# EAGLE board Screen-Adapters_multiple_v2 (EAGLE 7.0.0)
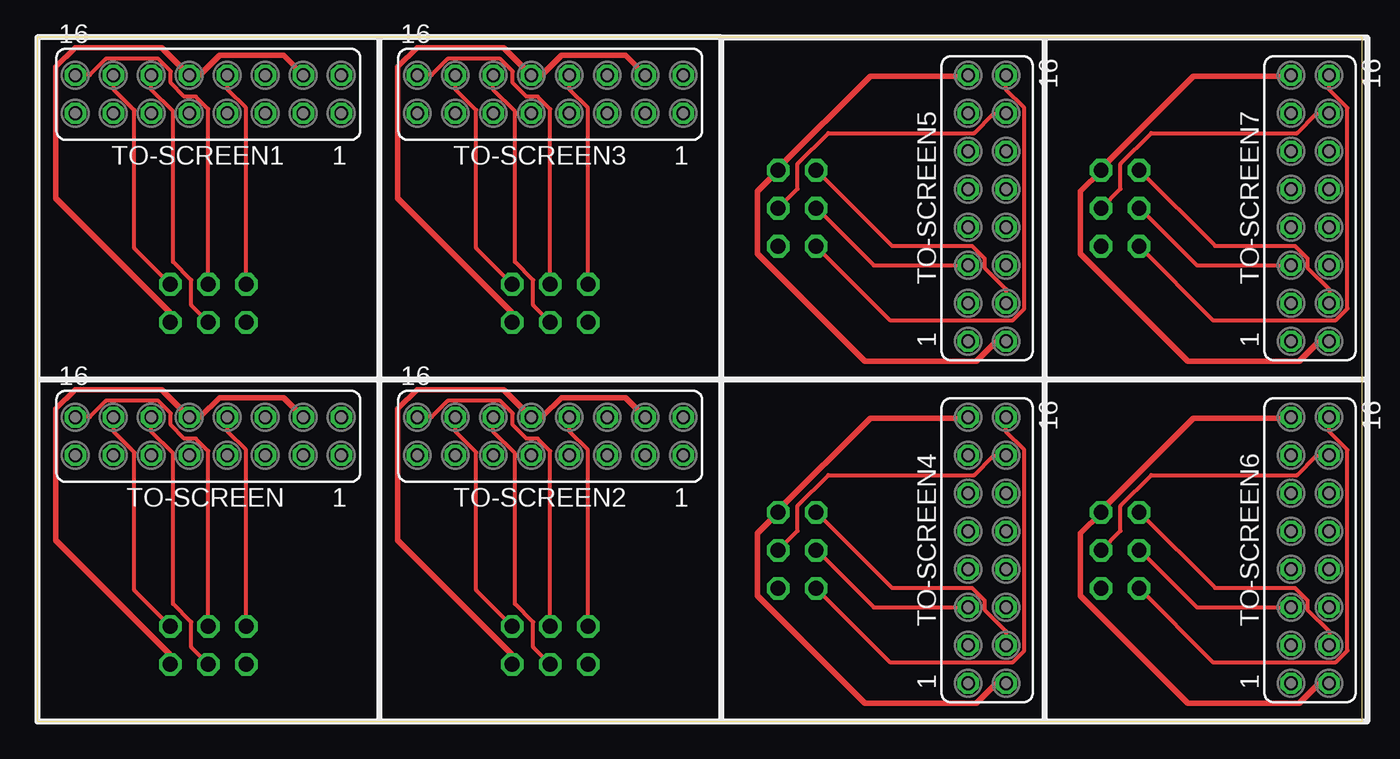
[diagram p0: board, top side]
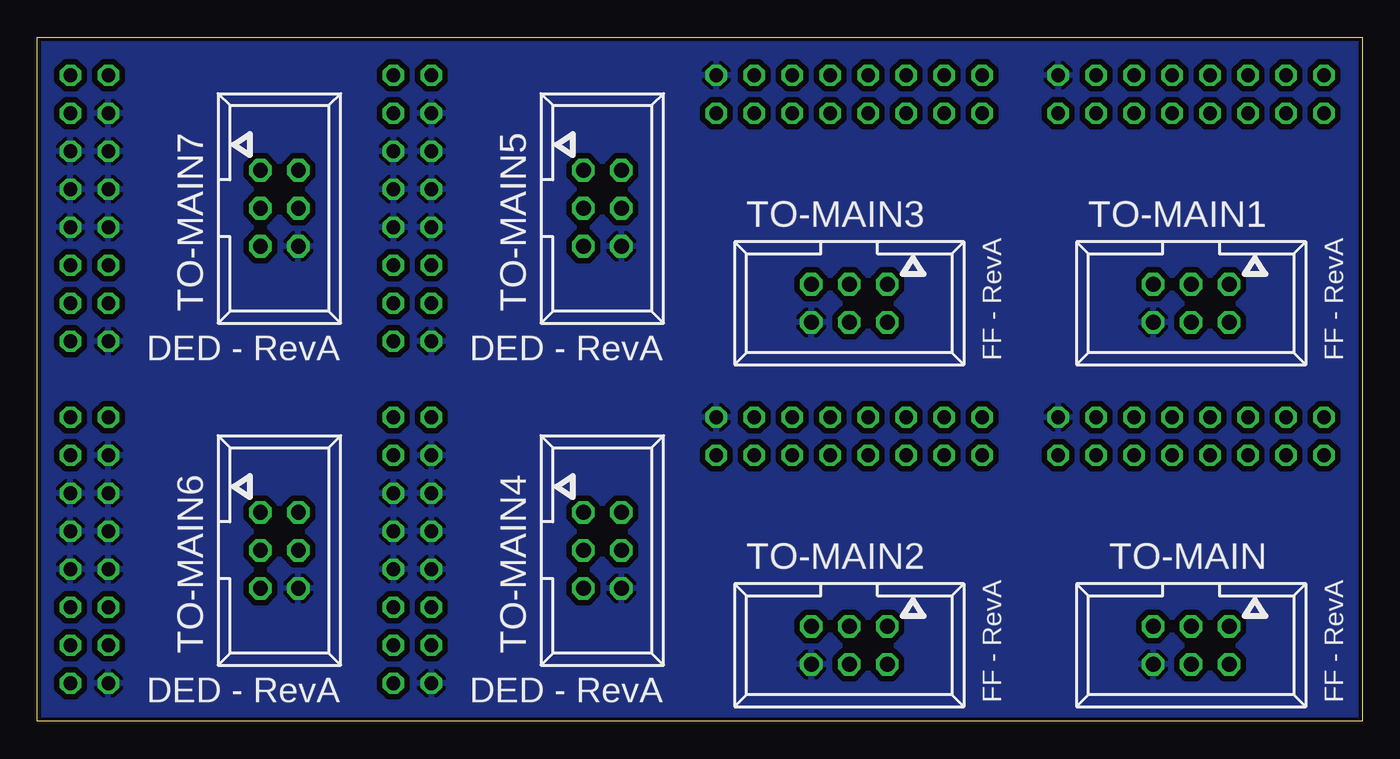
[diagram p1: board, bottom side, seen from below]

Size 88.57 x 45.71 mm. Coordinates in mm from the lower left corner, seen from the top.
Outline: 0,0 88.57,0 88.57,45.71 0,45.71 0,0
Copper layers (1*16): Top 0.035mm / dielectric 1.5mm / Bottom 0.035mm
Design rules "ITEADstudio_DRC": minimum track width 6mil, minimum drill 12mil, track to track 6mil, track to pad 6mil, pad to pad 6mil, via to via 6mil, smd to smd 0mil, copper to edge 10mil, drill to drill 10mil, minimum pad ring 10mil, minimum via ring 6mil, stop-mask expansion 2mil, vias tented up to drill 100mil, thermal gap 10mil
Net classes: 1 Power: width 0.381 mm, drill 0.381 mm, clearance 0.381 mm; 2 signal: width 0.254 mm, drill 0.254 mm, clearance 0.254 mm

## Footprints (pad centres in the part's own frame; a part is rotated, then mirrored left to right if it is on the bottom)
057-006-1 = drill 1 octagon: 1 -2.54,-1.27; 2 -2.54,1.27; 3 0,-1.27; 4 0,1.27; 5 2.54,-1.27; 6 2.54,1.27
FE08-2 = drill 0.914 octagon: 1 -8.89,1.27; 2 -8.89,-1.27; 3 -6.35,1.27; 4 -6.35,-1.27; 5 -3.81,1.27; 6 -3.81,-1.27; 7 -1.27,1.27; 8 -1.27,-1.27; 9 1.27,1.27; 10 1.27,-1.27; 11 3.81,1.27; 12 3.81,-1.27; 13 6.35,1.27; 14 6.35,-1.27; 15 8.89,1.27; 16 8.89,-1.27

## Placement (x,y rotation side)
TO-MAIN  057-006-1  [057-006-1]  11.43,5.08 180 bottom
TO-MAIN1  057-006-1  [057-006-1]  11.43,27.94 180 bottom
TO-MAIN2  057-006-1  [057-006-1]  34.29,5.08 180 bottom
TO-MAIN3  057-006-1  [057-006-1]  34.29,27.94 180 bottom
TO-MAIN4  057-006-1  [057-006-1]  50.8,11.43 270 bottom
TO-MAIN5  057-006-1  [057-006-1]  50.8,34.29 270 bottom
TO-MAIN6  057-006-1  [057-006-1]  72.39,11.43 270 bottom
TO-MAIN7  057-006-1  [057-006-1]  72.39,34.29 270 bottom
TO-SCREEN  [FE08-2]  11.43,19.05 180 top
TO-SCREEN1  [FE08-2]  11.43,41.91 180 top
TO-SCREEN2  [FE08-2]  34.29,19.05 180 top
TO-SCREEN3  [FE08-2]  34.29,41.91 180 top
TO-SCREEN4  [FE08-2]  63.5,11.43 90 top
TO-SCREEN5  [FE08-2]  63.5,34.29 90 top
TO-SCREEN6  [FE08-2]  85.09,11.43 90 top
TO-SCREEN7  [FE08-2]  85.09,34.29 90 top

## Library data of the parts
TO-MAIN TO-MAIN1-TO-MAIN7 = con-panduit; OC_FARNELL: unknown; OC_NEWARK: unknown
TO-SCREEN TO-SCREEN1-TO-SCREEN7 = con-lsta; OC_FARNELL: unknown; OC_NEWARK: unknown

## Nets
5V [Power]: TO-MAIN.2 TO-SCREEN.4 TO-SCREEN.10
5V1 [Power]: TO-MAIN1.2 TO-SCREEN1.4 TO-SCREEN1.10
5V2 [Power]: TO-MAIN2.2 TO-SCREEN2.4 TO-SCREEN2.10
5V3 [Power]: TO-MAIN3.2 TO-SCREEN3.4 TO-SCREEN3.10
5V4 [Power]: TO-MAIN4.2 TO-SCREEN4.2 TO-SCREEN4.15
5V5 [Power]: TO-MAIN5.2 TO-SCREEN5.2 TO-SCREEN5.15
5V6 [Power]: TO-MAIN6.2 TO-SCREEN6.2 TO-SCREEN6.15
5V7 [Power]: TO-MAIN7.2 TO-SCREEN7.2 TO-SCREEN7.15
CLK [signal]: TO-MAIN.1 TO-SCREEN.14
CLK1 [signal]: TO-MAIN1.1 TO-SCREEN1.14
CLK2 [signal]: TO-MAIN2.1 TO-SCREEN2.14
CLK3 [signal]: TO-MAIN3.1 TO-SCREEN3.14
CLK4 [signal]: TO-MAIN4.1 TO-SCREEN4.4
CLK5 [signal]: TO-MAIN5.1 TO-SCREEN5.4
CLK6 [signal]: TO-MAIN6.1 TO-SCREEN6.4
CLK7 [signal]: TO-MAIN7.1 TO-SCREEN7.4
DISP_A0 [signal]: TO-MAIN.4 TO-SCREEN.12
DISP_A1 [signal]: TO-MAIN1.4 TO-SCREEN1.12
DISP_A2 [signal]: TO-MAIN2.4 TO-SCREEN2.12
DISP_A3 [signal]: TO-MAIN3.4 TO-SCREEN3.12
DISP_A4 [signal]: TO-MAIN4.4 TO-SCREEN4.14
DISP_A5 [signal]: TO-MAIN5.4 TO-SCREEN5.14
DISP_A6 [signal]: TO-MAIN6.4 TO-SCREEN6.14
DISP_A7 [signal]: TO-MAIN7.4 TO-SCREEN7.14
GND [Power]: TO-MAIN1.6 TO-MAIN2.6 TO-MAIN3.6 TO-MAIN4.6 TO-MAIN5.6 TO-MAIN6.6 TO-MAIN7.6 TO-MAIN.6 TO-SCREEN1.2 TO-SCREEN2.2 TO-SCREEN3.2 TO-SCREEN4.1 TO-SCREEN4.7 TO-SCREEN4.8 TO-SCREEN4.9 TO-SCREEN4.10 TO-SCREEN4.11 TO-SCREEN4.12 TO-SCREEN4.13 TO-SCREEN5.1 TO-SCREEN5.7 TO-SCREEN5.8 TO-SCREEN5.9 TO-SCREEN5.10 TO-SCREEN5.11 TO-SCREEN5.12 TO-SCREEN5.13 TO-SCREEN6.1 TO-SCREEN6.7 TO-SCREEN6.8 TO-SCREEN6.9 TO-SCREEN6.10 TO-SCREEN6.11 TO-SCREEN6.12 TO-SCREEN6.13 TO-SCREEN7.1 TO-SCREEN7.7 TO-SCREEN7.8 TO-SCREEN7.9 TO-SCREEN7.10 TO-SCREEN7.11 TO-SCREEN7.12 TO-SCREEN7.13 TO-SCREEN.2
MOSI [signal]: TO-MAIN.3 TO-SCREEN.16
MOSI1 [signal]: TO-MAIN1.3 TO-SCREEN1.16
MOSI2 [signal]: TO-MAIN2.3 TO-SCREEN2.16
MOSI3 [signal]: TO-MAIN3.3 TO-SCREEN3.16
MOSI4 [signal]: TO-MAIN4.3 TO-SCREEN4.5
MOSI5 [signal]: TO-MAIN5.3 TO-SCREEN5.5
MOSI6 [signal]: TO-MAIN6.3 TO-SCREEN6.5
MOSI7 [signal]: TO-MAIN7.3 TO-SCREEN7.5
SELECT [signal]: TO-MAIN.5 TO-SCREEN.8
SELECT1 [signal]: TO-MAIN1.5 TO-SCREEN1.8
SELECT2 [signal]: TO-MAIN2.5 TO-SCREEN2.8
SELECT3 [signal]: TO-MAIN3.5 TO-SCREEN3.8
SELECT4 [signal]: TO-MAIN4.5 TO-SCREEN4.16
SELECT5 [signal]: TO-MAIN5.5 TO-SCREEN5.16
SELECT6 [signal]: TO-MAIN6.5 TO-SCREEN6.16
SELECT7 [signal]: TO-MAIN7.5 TO-SCREEN7.16

## Tracks (layer width: path | path; a pad name or v marks a point on that pad's centre or on a via)
5V
  Top 0.381: TO-SCREEN.4 16.46,21.64 12.19,21.64 10.9,20.34 10.21,20.34 TO-SCREEN.10 8.31,22.17 2.52,22.17 1.22,20.88 1.22,12.12 8.84,4.5 8.84,3.81 TO-MAIN.2
5V1
  Top 0.381: TO-SCREEN1.4 16.46,44.5 12.19,44.5 10.9,43.2 10.21,43.2 TO-SCREEN1.10 8.31,45.03 2.52,45.03 1.22,43.74 1.22,34.98 8.84,27.36 8.84,26.67 TO-MAIN1.2
5V2
  Top 0.381: TO-SCREEN2.4 39.32,21.64 35.05,21.64 33.76,20.34 33.07,20.34 TO-SCREEN2.10 31.17,22.17 25.38,22.17 24.08,20.88 24.08,12.12 31.7,4.5 31.7,3.81 TO-MAIN2.2
5V3
  Top 0.381: TO-SCREEN3.4 39.32,44.5 35.05,44.5 33.76,43.2 33.07,43.2 TO-SCREEN3.10 31.17,45.03 25.38,45.03 24.08,43.74 24.08,34.98 31.7,27.36 31.7,26.67 TO-MAIN3.2
5V4
  Top 0.381: TO-SCREEN4.2 64.77,2.52 64.08,2.52 62.79,1.22 55.32,1.22 48.16,8.38 48.16,12.57 49.53,13.95 TO-MAIN4.2 49.53,14.1 55.7,20.27 62.18,20.27 TO-SCREEN4.15
5V5
  Top 0.381: TO-SCREEN5.2 64.77,25.38 64.08,25.38 62.79,24.08 55.32,24.08 48.16,31.24 48.16,35.43 49.53,36.8 TO-MAIN5.2 49.53,36.96 55.7,43.13 62.18,43.13 TO-SCREEN5.15
5V6
  Top 0.381: TO-SCREEN6.2 86.36,2.52 85.67,2.52 84.38,1.22 76.91,1.22 69.75,8.38 69.75,12.57 71.12,13.95 TO-MAIN6.2 71.12,14.1 77.29,20.27 83.77,20.27 TO-SCREEN6.15
5V7
  Top 0.381: TO-SCREEN7.2 86.36,25.38 85.67,25.38 84.38,24.08 76.91,24.08 69.75,31.24 69.75,35.43 71.12,36.8 TO-MAIN7.2 71.12,36.96 77.29,43.13 83.77,43.13 TO-SCREEN7.15
CLK
  Top 0.254: TO-MAIN.1 6.48,8.76 6.48,17.98 5.11,19.36 5.11,20.27 TO-SCREEN.14
CLK1
  Top 0.254: TO-MAIN1.1 6.48,31.62 6.48,40.84 5.11,42.22 5.11,43.13 TO-SCREEN1.14
CLK2
  Top 0.254: TO-MAIN2.1 29.34,8.76 29.34,17.98 27.96,19.36 27.96,20.27 TO-SCREEN2.14
CLK3
  Top 0.254: TO-MAIN3.1 29.34,31.62 29.34,40.84 27.96,42.22 27.96,43.13 TO-SCREEN3.14
CLK4
  Top 0.254: TO-SCREEN4.4 64.77,6.02 63.32,7.47 63.32,8.08 62.48,8.91 57.15,8.91 52.12,13.95 TO-MAIN4.1
CLK5
  Top 0.254: TO-SCREEN5.4 64.77,28.88 63.32,30.33 63.32,30.94 62.48,31.77 57.15,31.77 52.12,36.8 TO-MAIN5.1
CLK6
  Top 0.254: TO-SCREEN6.4 86.36,6.02 84.91,7.47 84.91,8.08 84.07,8.91 78.74,8.91 73.71,13.95 TO-MAIN6.1
CLK7
  Top 0.254: TO-SCREEN7.4 86.36,28.88 84.91,30.33 84.91,30.94 84.07,31.77 78.74,31.77 73.71,36.8 TO-MAIN7.1
DISP_A0
  Top 0.254: TO-SCREEN.12 7.62,19.36 9.07,17.91 9.07,7.85 10.29,6.63 10.29,4.95 TO-MAIN.4
DISP_A1
  Top 0.254: TO-SCREEN1.12 7.62,42.22 9.07,40.77 9.07,30.71 10.29,29.49 10.29,27.81 TO-MAIN1.4
DISP_A2
  Top 0.254: TO-SCREEN2.12 30.48,19.36 31.93,17.91 31.93,7.85 33.15,6.63 33.15,4.95 TO-MAIN2.4
DISP_A3
  Top 0.254: TO-SCREEN3.12 30.48,42.22 31.93,40.77 31.93,30.71 33.15,29.49 33.15,27.81 TO-MAIN3.4
DISP_A4
  Top 0.254: TO-MAIN4.4 50.83,12.72 50.83,14.4 52.88,16.46 62.64,16.46 63.93,17.75 64.77,17.75 TO-SCREEN4.14
DISP_A5
  Top 0.254: TO-MAIN5.4 50.83,35.59 50.83,37.26 52.88,39.32 62.64,39.32 63.93,40.62 64.77,40.62 TO-SCREEN5.14
DISP_A6
  Top 0.254: TO-MAIN6.4 72.42,12.72 72.42,14.4 74.47,16.46 84.23,16.46 85.52,17.75 86.36,17.75 TO-SCREEN6.14
DISP_A7
  Top 0.254: TO-MAIN7.4 72.42,35.59 72.42,37.26 74.47,39.32 84.23,39.32 85.52,40.62 86.36,40.62 TO-SCREEN7.14
GND
  pour Bottom: 0,45.72 88.9,45.72 88.9,0 0,0
MOSI
  Top 0.254: TO-MAIN.3 11.43,18.06 10.59,18.9 9.83,18.9 8.91,19.81 8.91,20.57 8.08,21.41 4.57,21.41 3.5,20.34 2.59,20.34 TO-SCREEN.16
MOSI1
  Top 0.254: TO-MAIN1.3 11.43,40.92 10.59,41.76 9.83,41.76 8.91,42.67 8.91,43.43 8.08,44.27 4.57,44.27 3.5,43.2 2.59,43.2 TO-SCREEN1.16
MOSI2
  Top 0.254: TO-MAIN2.3 34.29,18.06 33.45,18.9 32.69,18.9 31.77,19.81 31.77,20.57 30.94,21.41 27.43,21.41 26.36,20.34 25.45,20.34 TO-SCREEN2.16
MOSI3
  Top 0.254: TO-MAIN3.3 34.29,40.92 33.45,41.76 32.69,41.76 31.77,42.67 31.77,43.43 30.94,44.27 27.43,44.27 26.36,43.2 25.45,43.2 TO-SCREEN3.16
MOSI4
  Top 0.254: TO-SCREEN4.5 55.93,7.62 52.12,11.43 TO-MAIN4.3
MOSI5
  Top 0.254: TO-SCREEN5.5 55.93,30.48 52.12,34.29 TO-MAIN5.3
MOSI6
  Top 0.254: TO-SCREEN6.5 77.52,7.62 73.71,11.43 TO-MAIN6.3
MOSI7
  Top 0.254: TO-SCREEN7.5 77.52,30.48 73.71,34.29 TO-MAIN7.3
SELECT
  Top 0.254: TO-SCREEN.8 12.72,20.27 12.72,19.36 13.95,18.14 13.95,6.4 TO-MAIN.5
SELECT1
  Top 0.254: TO-SCREEN1.8 12.72,43.13 12.72,42.22 13.95,41 13.95,29.26 TO-MAIN1.5
SELECT2
  Top 0.254: TO-SCREEN2.8 35.59,20.27 35.59,19.36 36.8,18.14 36.8,6.4 TO-MAIN2.5
SELECT3
  Top 0.254: TO-SCREEN3.8 35.59,43.13 35.59,42.22 36.8,41 36.8,29.26 TO-MAIN3.5
SELECT4
  Top 0.254: TO-SCREEN4.16 64.77,19.36 65.99,18.14 65.99,4.72 65.23,3.96 57,3.96 TO-MAIN4.5
SELECT5
  Top 0.254: TO-SCREEN5.16 64.77,42.22 65.99,41 65.99,27.58 65.23,26.82 57,26.82 TO-MAIN5.5
SELECT6
  Top 0.254: TO-SCREEN6.16 86.36,19.36 87.58,18.14 87.58,4.72 86.82,3.96 78.59,3.96 TO-MAIN6.5
SELECT7
  Top 0.254: TO-SCREEN7.16 86.36,42.22 87.58,41 87.58,27.58 86.82,26.82 78.59,26.82 TO-MAIN7.5

## Text on the board
bNames: FF - RevA | FF - RevA | DED - RevA | DED - RevA | FF - RevA | FF - RevA | DED - RevA | DED - RevA